# Altium PCB eos26_scan_cable_adapter.PcbDoc
Units mil, origin at the board's own origin, x right, y up, seen from the top; angles counter-clockwise.
Board outline 850 x 750 mil, 2 copper layers (Top Layer, Bottom Layer); 2 components, 9 nets, 32 pads, 24 vias.
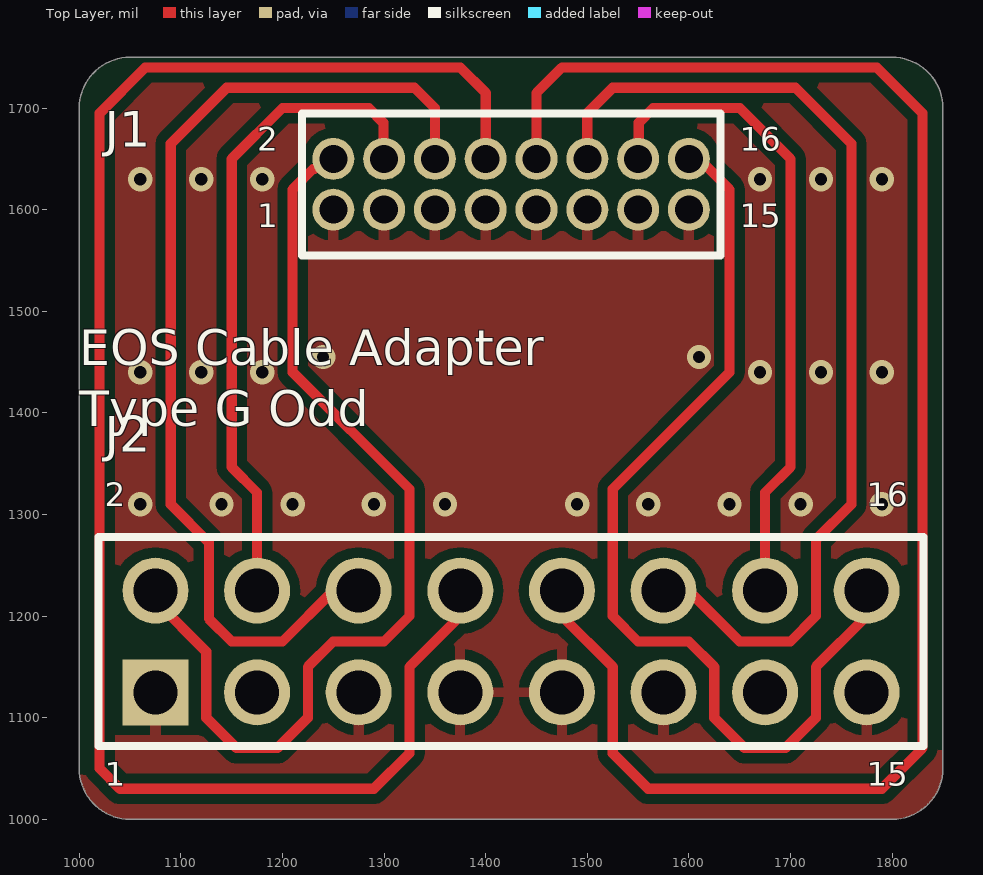
[diagram p0: Top Layer view]
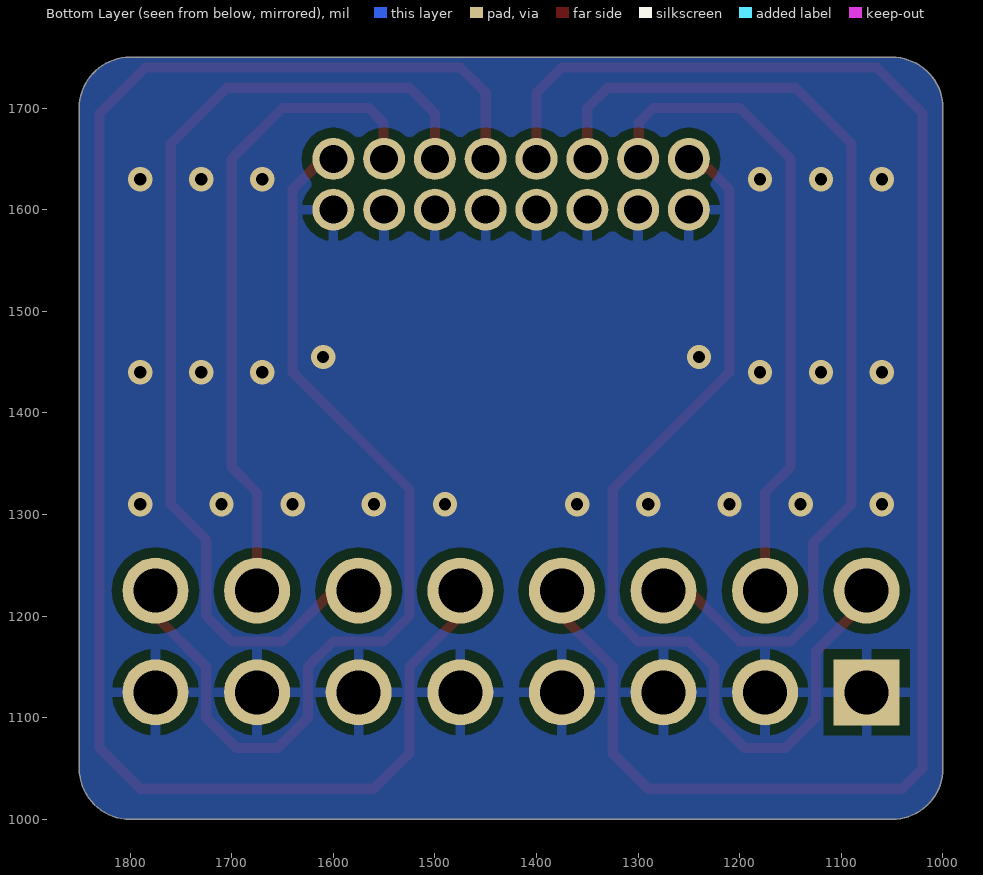
[diagram p1: Bottom Layer view, seen from below]

## Layer stack, top to bottom
Top Solder: solder mask 0.4, Solder Resist, Dk 3.5
Top Layer: signal copper 1.4
Dielectric 1: dielectric 12.6, FR-4, Dk 4.8
Bottom Layer: signal copper 1.4
Bottom Solder: solder mask 0.4, Solder Resist, Dk 3.5

## Board outline
1050,1000 1800,1000 ccw(c1800,1050) 1850,1050 1850,1700 ccw(c1800,1700) 1800,1750 1050,1750 ccw(c1050,1700) 1000,1700 1000,1050 ccw(c1050,1050)

## Design rules (kind name [scope] priority, off if disabled: settings)
Clearance [All] p1: gap=10 ignorepadtopadclearanceinfootprint=TRUE except(0: Arc-Hole Track-Hole SMDPad-Hole THPad-Hole Via-Hole Fill-Hole Poly-Hole Region-Hole Text-Hole)
MinimumSolderMaskSliver [All] p1 off: minsoldermaskwidth=10
PlaneConnect PlaneConnect_Via [IsVia] p1: planeconnectstyle=Direct reliefexpansion=20 reliefentries=4 reliefconductorwidth=10 reliefairgap=10
PlaneConnect [All] p2: planeconnectstyle=Relief reliefexpansion=20 reliefentries=4 reliefconductorwidth=10 reliefairgap=10
PolygonConnect PolygonConnect_Via [All vs IsVia] p1: connectstyle=Direct reliefconductorwidth=10 reliefentries=4 polygonreliefangle="90 Angle" airgapwidth=10
PolygonConnect [All] p2: connectstyle=Relief reliefconductorwidth=10 reliefentries=4 polygonreliefangle="90 Angle" airgapwidth=10
RoutingVias [All] p1: holewidth=28 width=50 viastyle="Through Hole" minholewidth=28 minwidth=50 maxholewidth=28 maxwidth=50
SilkToSilkClearance [All] p1 off: silktosilkclearance=10
SilkToSolderMaskClearance [IsPad] p1 off: minsilkscreentomaskgap=10 clearancetoexposedcopper=TRUE
SolderMaskExpansion [All] p1: expansion=4
Width [All] p1: maxlimit=10 minlimit=10 preferedwidth=10
26 further rules are at their usual default settings.

## Components (designator, comment, footprint, x,y, rotation, side; value= is the part's Value field where it differs from the comment)
J1 "62201621121" 62201621121 1425,1625 r0 top
J2 "61301621121" 61301621121 1425,1175 r0 top

## Footprints (in the part's own frame and the unit in brackets; to place one, negate y for a bottom-side part, rotate by r counter-clockwise, add the part's x,y. Pads: shape width x height; smd on the part's side, far side on the other; paste and mask are expansions set on the pad)
61301621121 [mm] "Pin Header, pitch 2.54 mm, THT, Vertical, dual row, 16p"
  rect 1.65x1.65 hole 1.1: 1(-8.89,-1.27)
  round 1.65 hole 1.1: 2(-8.89,1.27) 3(-6.35,-1.27) 4(-6.35,1.27) 5(-3.81,-1.27) 6(-3.81,1.27) 7(-1.27,-1.27) 8(-1.27,1.27) 9(1.27,-1.27) 10(1.27,1.27) 11(3.81,-1.27) 12(3.81,1.27) 13(6.35,-1.27) 14(6.35,1.27) 15(8.89,-1.27) 16(8.89,1.27)
  silkscreen extent -10.31,-2.62 10.31,2.62, body extent -10.16,-2.54 10.16,2.54, height 8.59
62201621121 [mm] "Pin Header, pitch 1.27 mm, THT, Vertical, dual row, 16p"
  round 1.05 hole 0.7: 1(-4.445,-0.635) 2(-4.445,0.635) 3(-3.175,-0.635) 4(-3.175,0.635) 5(-1.905,-0.635) 6(-1.905,0.635) 7(-0.635,-0.635) 8(-0.635,0.635) 9(0.635,-0.635) 10(0.635,0.635) 11(1.905,-0.635) 12(1.905,0.635) 13(3.175,-0.635) 14(3.175,0.635) 15(4.445,-0.635) 16(4.445,0.635)
  silkscreen extent -5.23,-1.78 5.23,1.78, body extent -5.08,-1.7 5.08,1.7, height 5.33

## Part data
J1: library part CMP-1502-00950-1, "THT Vertical Pin Header WR-PHD, Pitch 1.27 mm, Dual Row, 16 pins", Contact Resistance=20mOhm, Manufacturer="Wurth Elektronik", Operating Temperature=-40to105degC, Rated Current=1A, Withstanding Voltage=500VAC, Working Voltage=100VAC, Datasheet URL=https://katalog.we-online.de/em/datasheet/62201621121.pdf, Gender=Male, Manufacturer URL=http://www.we-online.de, Mounting Technology=THT, Orientation=Vertical, Package Reference=62201621121, Packaging=Box, Part Number=62201621121, Pin Number=16, Pitch=1.27mm, Publisher=WurthElektronik, Row Number=Dual
J2: library part CMP-1502-01097-1, "THT Vertical Pin Header WR-PHD, Pitch 2.54 mm, Dual Row, 16 pins", Contact Resistance=20mOhm, Manufacturer="Wurth Elektronik", Operating Temperature=-40to105degC, Rated Current=3A, Withstanding Voltage=500VAC, Working Voltage=250VAC, Datasheet URL=https://katalog.we-online.de/em/datasheet/6130xx21121.pdf, Gender=Male, Manufacturer URL=http://www.we-online.de, Mounting Technology=THT, Orientation=Vertical, Package Reference=61301621121, Packaging=Bag, Part Number=61301621121, Pin Number=16, Pitch=2.54mm, Publisher=WurthElektronik, Row Number=Dual

## Via types
v1: diameter 24, hole 12, Top Layer to Bottom Layer, 24 vias

## Nets (pads, with @x,y where several pads share a name; then routed paths per layer and width w, separated by ;. In a path a pad name is that pad's centre, name@x,y a point inside that pad or via, vN(x,y) a via of type N, cw(c..) or ccw(c..) an arc to the next point about the centre after c; other vN are vias at no path point)
GND: J1.1 J1.3 J1.5 J1.7 J1.9 J1.11 J1.13 J1.15 J2.1 J2.3 J2.5 J2.7 J2.9 J2.11 J2.13 J2.15
  other v1: 1060,1310 1140,1310 1210,1310 1290,1310 1360,1310 1490,1310 1560,1310 1640,1310 1710,1310 1790,1310 1060,1440 1120,1440 1180,1440 1670,1440 1730,1440 1790,1440 1240,1455 1610,1455 1060,1630 1120,1630 1180,1630 1670,1630 1730,1630 1790,1630
SIGNAL_PIN_2: J1.2 J2.2 | length 951.3
  Top Layer w10: J2.2@1075,1215 1125,1165 1125,1100 1155,1070 1195,1070 1225,1100 1225,1150 1250,1175 1300,1175 1325,1200 1325,1325 1210,1440 1210,1620 1230,1640 1231.52,1640 1241.52,1650 J1.2
SIGNAL_PIN_4: J1.4 J2.4 | length 647.3
  Top Layer w10: J2.4 1175,1321.63 1150,1346.63 1150,1650 1200,1700 1285,1700 1299.33,1685.67 1299.33,1650.67 J1.4
SIGNAL_PIN_6: J1.6 J2.6 | length 1001.6
  Top Layer w10: J2.6 1250,1225 1200,1175 1150,1175 1127.52,1197.48 1127.52,1272.48 1090,1310 1090,1665 1145,1720 1330,1720 1350,1700 J1.6
SIGNAL_PIN_8: J1.8 J2.8 | length 1627.5
  Top Layer w10: J2.8 1375,1200 1325,1150 1325,1065 1290,1030 1040,1030 1020,1050 1020,1695 1065,1740 1375,1740 1400,1715 J1.8
SIGNAL_PIN_10: J1.10 J2.10 | length 1615.8
  Top Layer w10: J1.10 1450,1715 1475,1740 1785,1740 1830,1695 1830,1070 1790,1030 1560,1030 1525,1065 1525,1150 1475,1200 J2.10
SIGNAL_PIN_12: J1.12 J2.12 | length 998.7
  Top Layer w10: J1.12 1500,1695 1525,1720 1705,1720 1760,1665 1760,1310 1725,1275 1725,1200 1700,1175 1650,1175 1600,1225 J2.12
SIGNAL_PIN_14: J1.14 J2.14 | length 647.3
  Top Layer w10: J1.14 1550.67,1650.67 1550.67,1685.67 1565,1700 1650,1700 1700,1650 1700,1346.63 1675,1321.63 J2.14
SIGNAL_PIN_16: J1.16 J2.16 | length 961.3
  Top Layer w10: J1.16 1610,1650 1640,1620 1640,1440 1525,1325 1525,1200 1550,1175 1600,1175 1625,1150 1625,1100 1655,1070 1695,1070 1725,1100 1725,1150 1775,1200 J2.16

## Polygon pours and split planes (outlines as drawn)
GND on Bottom Layer (solid, pour order 0): 1050,1750 1800,1750 cw(c1800,1700) 1850,1700 1850,1050 cw(c1800,1050) 1800,1000 1050,1000 cw(c1050,1050) 1000,1050 1000,1700 cw(c1050,1700)
GND on Top Layer (solid, remove dead copper, pour order 2): 1050,1750 1800,1750 cw(c1800,1700) 1850,1700 1850,1050 cw(c1800,1050) 1800,1000 1050,1000 cw(c1050,1050) 1000,1050 1000,1700 cw(c1050,1700)

## Silkscreen, mask and mechanical layers (free items; w line width, h text height)
Top Overlay:
  text "EOS Cable Adapter / Type G Odd" at 1000,1375 h60
Mechanical 1:
  the board outline again, w1

## Text inside footprints (layer, text, board x,y; h text height)
J1: Top Overlay "1" at 1175,1575 h40; Top Overlay "2" at 1175,1650 h40; Top Overlay "16" at 1650,1650 h40; Top Overlay "15" at 1650,1575 h40
J2: Top Overlay "16" at 1775,1300 h40; Top Overlay "15" at 1775,1025 h40; Top Overlay "1" at 1025,1025 h40; Top Overlay "2" at 1025,1300 h40